# Altium PCB hexboard_round.PcbDoc
Units mil, origin at the board's own origin, x right, y up, seen from the top; angles counter-clockwise.
Board outline 2598.43 x 2250.64 mil, 2 copper layers (Top Layer, Bottom Layer); 67 components, 57 nets, 280 pads, 25 vias.
Unrouted connection lines stored in the file: 73.
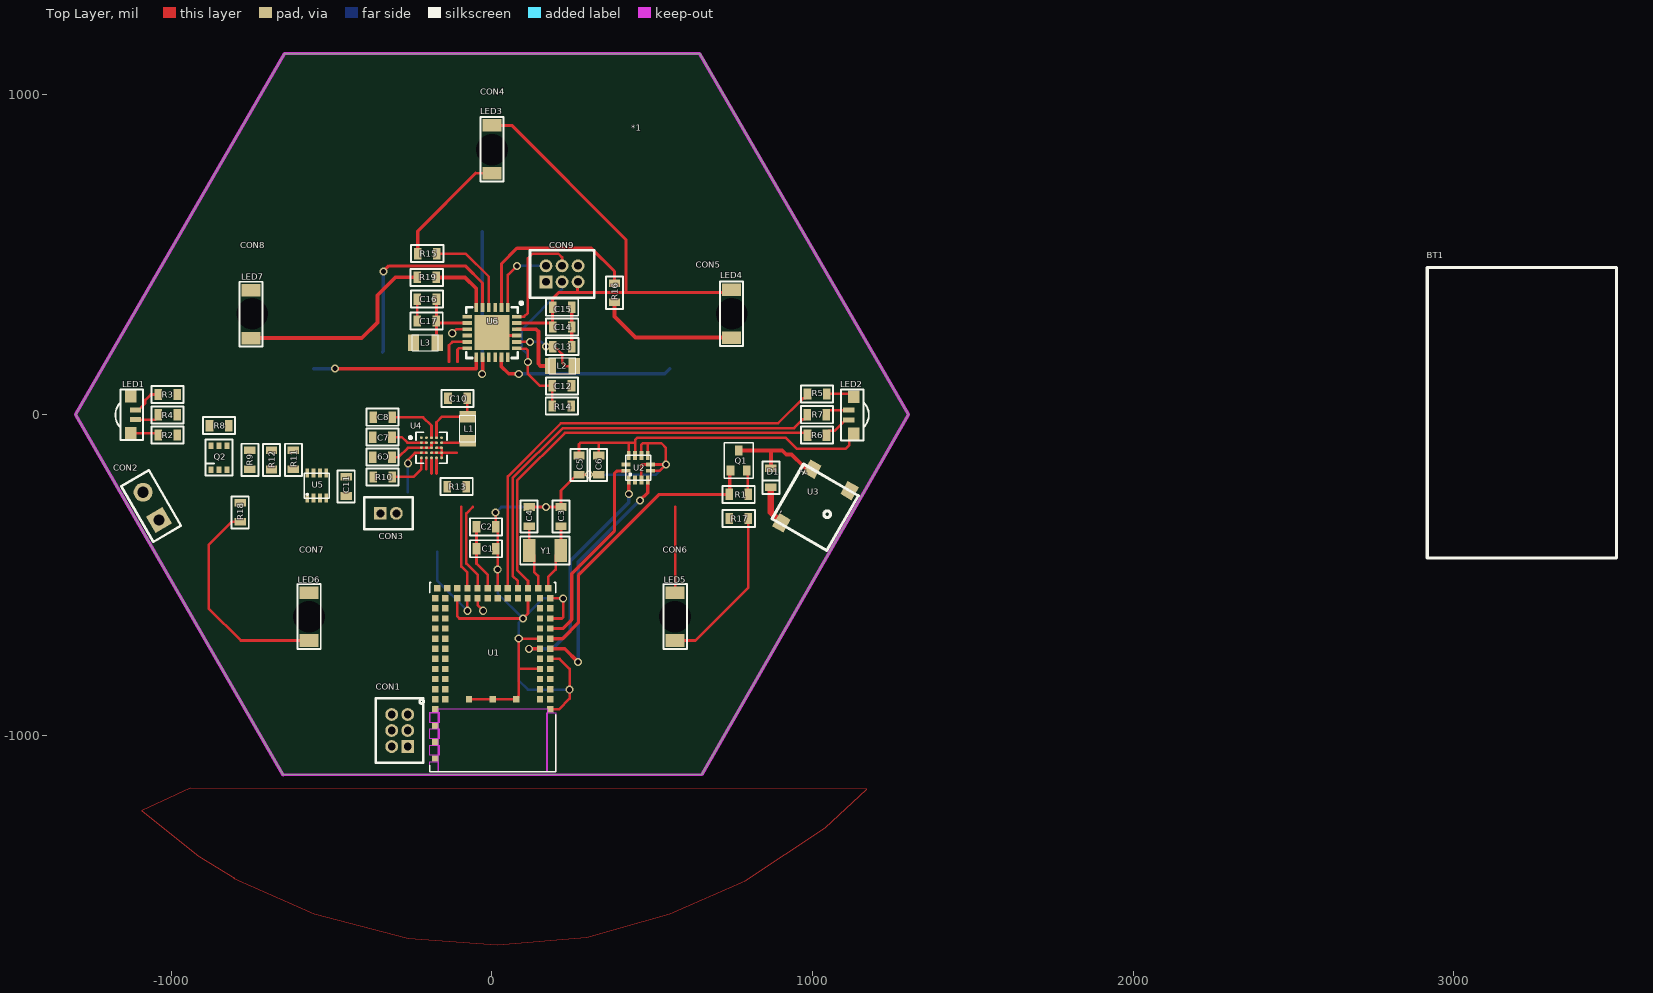
[diagram p0: Top Layer view]
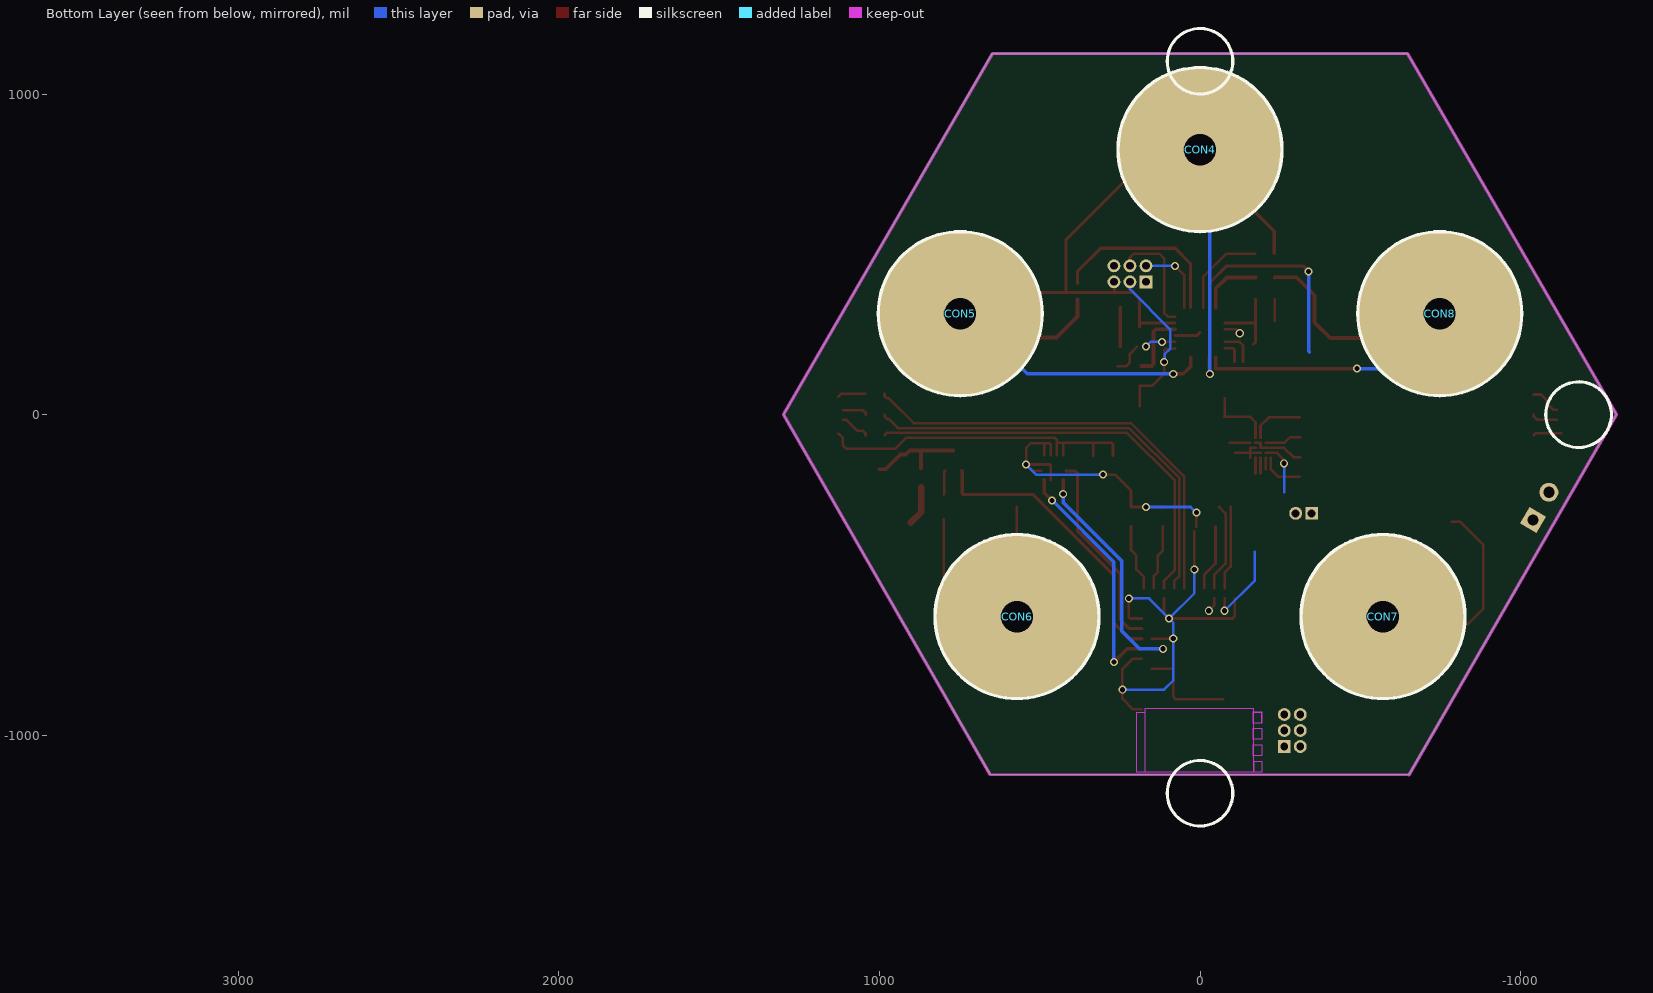
[diagram p1: Bottom Layer view, seen from below]
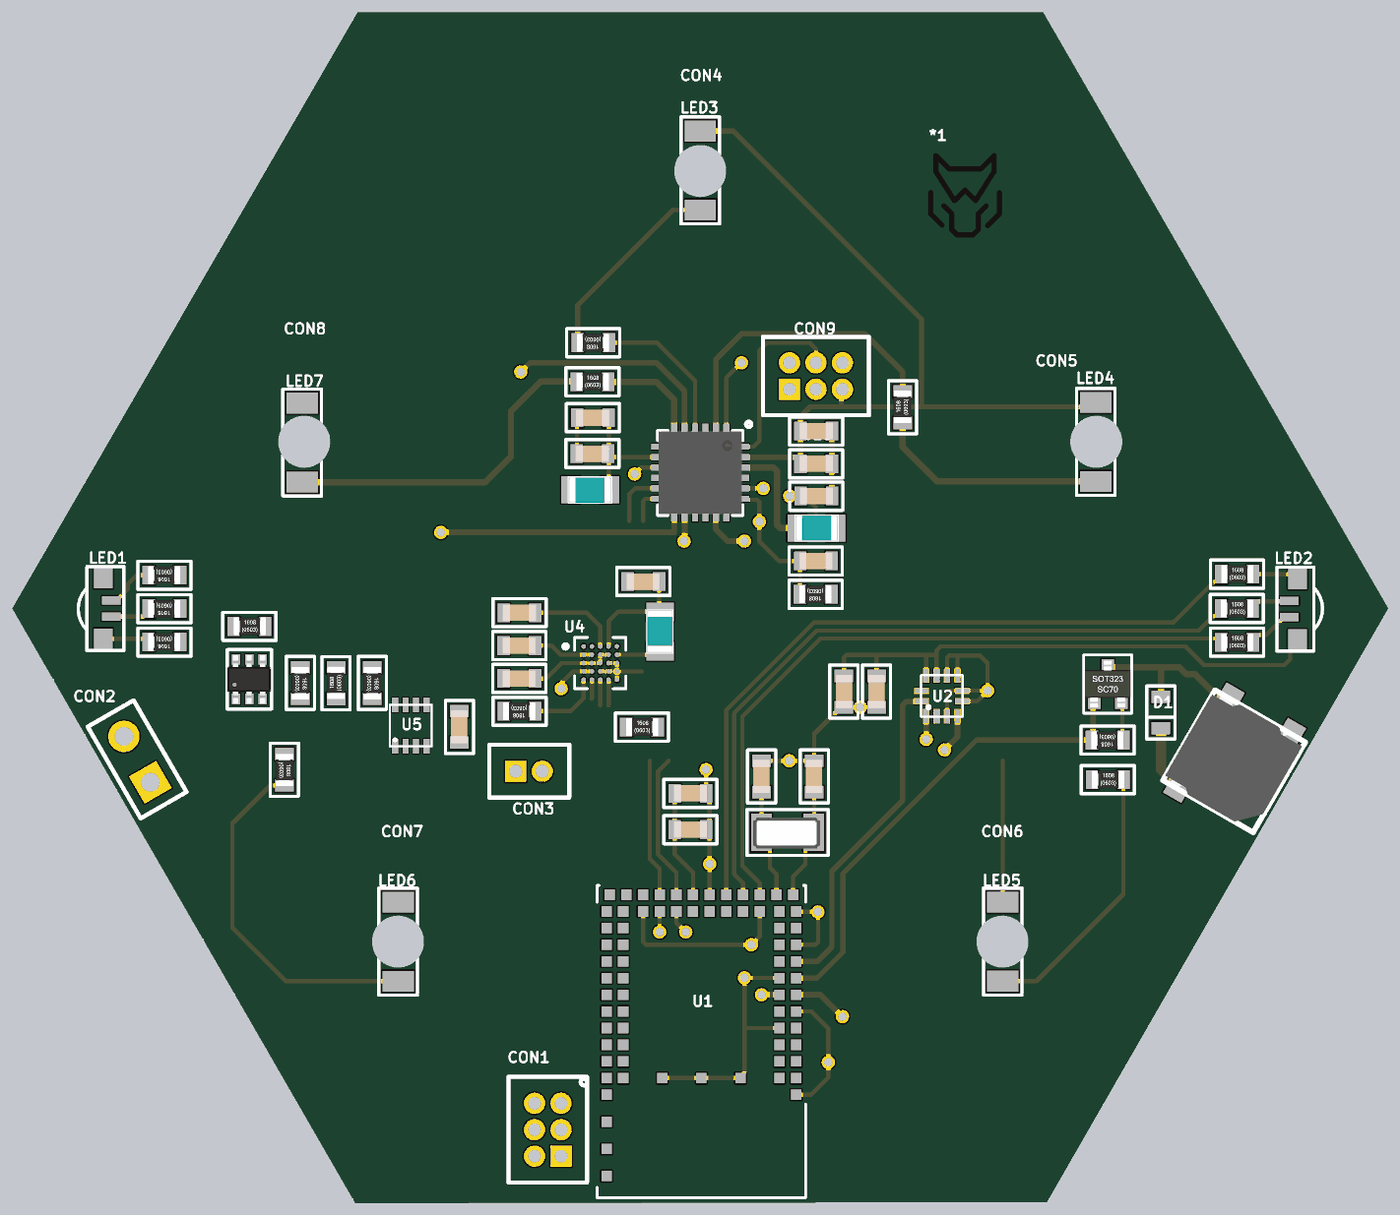
[diagram p2: 3D render of the assembled board from above, using the file's embedded part models]

## Layer stack, top to bottom
Top Solder: solder mask 0.4, Solder Resist, Dk 3.5
Top Layer: signal copper 1.4
Dielectric1: dielectric 12.6, FR-4, Dk 4.8
Bottom Layer: signal copper 1.4
Bottom Solder: solder mask 0.4, Solder Resist, Dk 3.5

## Board outline
-651.46,-1124.08 -1299.21,0 -647.17,1126.55 647.62,1126.3 1299.21,0 654.64,-1122.23

## Design rules (kind name [scope] priority, off if disabled: settings)
Clearance [All] p1: gap=7 ignorepadtopadclearanceinfootprint=FALSE except(0: Arc-Hole Track-Hole SMDPad-Hole THPad-Hole Via-Hole Fill-Hole Poly-Hole Region-Hole Text-Hole; 4: Arc-SMDPad Arc-THPad Arc-Via Track-SMDPad Track-THPad Track-Via SMDPad-SMDPad SMDPad-THPad SMDPad-Via THPad-THPad THPad-Via; 8: THPad-Text)
ComponentClearance [All] p1 off: gap=10 collisioncheckmode=3 verticalgap=10 showdistances=FALSE
HoleSize [All] p1: absolutevalues=TRUE maxlimit=150 minlimit=1 maxpercent=80.000 minpercent=20.000
PlaneConnect [All] p1: planeconnectstyle=Direct reliefexpansion=20 reliefentries=4 reliefconductorwidth=10 reliefairgap=10
PolygonConnect PolygonConnect_vias [All] p1: thpad.connectstyle=Direct thpad.reliefconductorwidth=10 thpad.reliefentries=4 thpad.polygonreliefangle="90 Angle" thpad.airgapwidth=10 smdpad.connectstyle=Relief smdpad.reliefconductorwidth=10 smdpad.reliefentries=4 smdpad.polygonreliefangle="90 Angle" smdpad.airgapwidth=10 via.connectstyle=Direct via.reliefconductorwidth=10 via.reliefentries=4 via.polygonreliefangle="90 Angle" via.airgapwidth=10
RoomDefinition Accessories [InComponentClass('Accessories')] p1: confinementstyle=ConfineIn formatcopy=TRUE lockcomponents=FALSE outline -3800,-4800 -1800,-4800 -1800,-3800 -3800,-3800
RoomDefinition Touch_panel [InComponentClass('Touch_panel')] p2: confinementstyle=ConfineIn formatcopy=TRUE lockcomponents=FALSE outline -3800,-4800 -1800,-4800 -1800,-3800 -3800,-3800
RoomDefinition Power_supply [InComponentClass('Power_supply')] p3: confinementstyle=ConfineIn formatcopy=TRUE lockcomponents=FALSE outline -3800,-4800 -1800,-4800 -1800,-3800 -3800,-3800
RoomDefinition CPU [InComponentClass('CPU')] p4: confinementstyle=ConfineIn formatcopy=TRUE lockcomponents=FALSE outline -3800,-4800 -1800,-4800 -1800,-3800 -3800,-3800
RoutingVias [All] p1: holewidth=16 width=25 viastyle="Through Hole" minholewidth=10 minwidth=18 maxholewidth=16 maxwidth=50
SilkToSolderMaskClearance SilkscreenOverComponentPads [IsPad] p1: minsilkscreentomaskgap=10 clearancetoexposedcopper=TRUE
SolderMaskExpansion [All] p1: expansion=3 istentingtop=FALSE
Width [All] p1: maxlimit=100 minlimit=8 preferedwidth=8 minimp=50.000000 maximp=50.000000 favimp=50.000000
26 further rules are at their usual default settings.

## Classes and differential pairs
component class Accessories: C5 C6 D1 LED1 LED2 Q1 R1 R2 R3 R4 R5 R6 R7 U2 U3
component class Power_supply: BT1 C7 C8 C9 C10 C11 CON2 CON3 L1 Q2 R8 R9 R10 R11 R12 R13 U4 U5
component class CPU: *1 C1 C2 C3 C4 CON1 U1 Y1
component class Touch_panel: C12 C13 C14 C15 C16 C17 CON4 CON5 CON6 CON7 CON8 CON9 L2 L3 LED3 LED4 LED5 LED6 LED7 R14 R15 R16 R17 R18 R19 U6

## Components (designator, comment, footprint, x,y, rotation, side; value= is the part's Value field where it differs from the comment)
*1 "LOGO" NEWLOGO2 500,791.34 r0 top
BT1 "BATTERY_LI_ION" "LI-ion battery 100mAh" 3507.87,-446.85 r90 top
C1 "100nF" C0603L -18.46,-416.89 r0 top
C2 "1uF" C0603L -18.46,-348.44 r0 top
C3 "10pF" C0603L 214.01,-317.57 r90 top
C4 "10pF" C0603L 114.53,-317.57 r90 top
C5 "100nF" C0603L 272.59,-157.38 r270 top
C6 "1uF" C0603L 334.17,-157.38 r270 top
C7 "2,2uF" C0603L -341.91,-71.5 r180 top
C8 "10uF" C0603L -341.55,-9.35 r180 top
C9 "10uF" C0603L -341.91,-133.73 r180 top
C10 "10uF" C0603L -107.68,49.49 r180 top
C11 "100nF" C0603L -456.17,-223.81 r90 top
C12 "100nF" C0603L 218.47,90.87 r0 top
C13 "100nF" C0603L 219.4,213.53 r0 top
C14 "100nF" C0603L 219.09,274.56 r0 top
C15 "10uF" C0603L 219.09,336.41 r0 top
C16 "100nF" C0603L -203.13,359.21 r180 top
C17 "1uF" C0603L -203.94,291.19 r180 top
CON1 "SWD" HDR2x3_1mm27 -287.99,-985.43 r90 top
CON2 "Header 2" HDR1X2 -1038.59,-328.6 r120 top
CON3 "Battery" HDR1X2_1mm27 -348.47,-307.81 r0 top
CON4 "Header1" P_CAP_13mm_B 0,826.77 r0 top
CON5 "Header1" P_CAP_13mm_B 748.03,314.96 r0 top
CON6 "Header1" P_CAP_13mm_B 570.87,-629.92 r0 top
CON7 "Header1" P_CAP_13mm_B -570.87,-629.92 r0 top
CON8 "Header1" P_CAP_13mm_B -748.03,314.96 r0 top
CON9 "SWD" HDR2x3_1mm27 218.54,439.18 r0 top
D1 "4148" 0603-DIODE 870.08,-167.31 r270 top
L1 "2.2uH" L0805 -75.78,-43.95 r90 top
L2 "BLM18PG471SN1" L0805 219.4,151.64 r0 top
L3 "BLM18PG471SN1" L0805 -207.91,224.21 r180 top
LED1 "LED_RGB" LED_604APFA3010LSEEZGKQ -1119.84,0.01 r270 top
LED2 "LED_RGB" LED_604APFA3010LSEEZGKQ 1120.32,-1.55 r90 top
LED3 "LED" LED1206_BOTTOM_2_5 -39.21,931.42 r270 top
LED4 "LED" LED1206_BOTTOM_2_5 707.86,418.3 r270 top
LED5 "LED" LED1206_BOTTOM_2_5 532.12,-526.22 r270 top
LED6 "LED" LED1206_BOTTOM_2_5 -609.9,-526.3 r270 top
LED7 "LED" LED1206_BOTTOM_2_5 -791.05,417.04 r270 top
Q1 "BSS138W" SOT-323 744.09,-174.46 r0 top
Q2 "Si1555DL" SOT-363 -876.67,-171.43 r0 top
R1 "330k" 1608[0603] 769.69,-249.26 r180 top
R2 "1k" 1608[0603] -1011.81,-63.95 r180 top
R3 "1k" 1608[0603] -1011.81,62.48 r180 top
R4 "1k" 1608[0603] -1011.81,-0.96 r180 top
R5 "1k" 1608[0603] 1013.78,64.96 r0 top
R6 "1k" 1608[0603] 1013.65,-63.68 r0 top
R7 "1k" 1608[0603] 1013.33,0 r0 top
R8 "330k" 1608[0603] -851.67,-33.72 r0 top
R9 "33k" 1608[0603] -755.03,-140.73 r270 top
R10 "10k" 1608[0603] -341.16,-194.68 r180 top
R11 "330k" 1608[0603] -619.08,-140.71 r270 top
R12 "47k" 1608[0603] -688.24,-141.59 r90 top
R13 "10k" 1608[0603] -110.32,-224.13 r0 top
R14 "100k" 1608[0603] 218.15,26.4 r180 top
R15 "1k" 1608[0603] -201.82,501.97 r180 top
R16 "1k" 1608[0603] 381.89,380.07 r90 top
R17 "1k" 1608[0603] 769.69,-323.44 r0 top
R18 "1k" 1608[0603] -785.17,-304.72 r270 top
R19 "1k" 1608[0603] -203.79,428.56 r0 top
U1 "BL653" BL653 2.14,-818.9 r180 top
U2 "LIS2DH12" LGA50P200X200X100-12N 456.27,-165.45 r90 top
U3 "BUZZER" SMT28 972.28,-154.47 r240 top
U4 "nPM1100" BGA25C40P5X5_207X207X52N -188.81,-103.32 r0 top
U5 "MAX17048G" TDFN8_2x2x075 -546.72,-221.45 r0 top
U6 "ATSAML10_24" QFN24_4x4 0,256.48 r270 top
Y1 "32768Hz" X_FC-13F 164.77,-423.56 r180 top

## Footprints (in the part's own frame and the unit in brackets; to place one, negate y for a bottom-side part, rotate by r counter-clockwise, add the part's x,y. Pads: shape width x height; smd on the part's side, far side on the other; paste and mask are expansions set on the pad)
0603-DIODE [mm]
  rect 0.6x0.9 smd: 1(0,0) 2(1.5,0)
  silkscreen extent -0.52,-0.68 2.03,0.67, body extent -0.05,-0.4 1.55,0.4, height 0.66
1608[0603] [mm] "Body 1.6 x 0.8 mm (LxW typ)"
  rect 0.6x0.9 smd: 1(-0.75,-0.01) 2(0.76,-0.01)
  silkscreen extent -1.27,-0.68 1.28,0.67, body extent -0.75,-0.43 0.79,0.42, height 0.45
BGA25C40P5X5_207X207X52N [mm]
  round 0.22 smd: A1(-0.8,0.8) A2(-0.4,0.8) A3(0,0.8) A4(0.4,0.8) A5(0.8,0.8) B1(-0.8,0.4) B2(-0.4,0.4) B3(0,0.4) B4(0.4,0.4) B5(0.8,0.4) C1(-0.8,0) C2(-0.4,0) C3(0,0) C4(0.4,0) C5(0.8,0) D1(-0.8,-0.4) D2(-0.4,-0.4) D3(0,-0.4) D4(0.4,-0.4) D5(0.8,-0.4) E1(-0.8,-0.8) E2(-0.4,-0.8) E3(0,-0.8) E4(0.4,-0.8) E5(0.8,-0.8)
  silkscreen extent -1.76,-1.23 1.23,1.23, body extent -1.04,-1.04 1.04,1.04, height 0.5
BL653 [mm]
  rect 0.5x0.5 smd: 0(4.55,2.55) 1(4.55,1.75) 2(3.75,1.75) 3(4.55,0.95) 4(3.75,0.95) 5(4.55,0.15) 6(3.75,0.15) 7(4.55,-0.65) 8(3.75,-0.65) 9(4.55,-1.45) 10(3.75,-1.45) 11(4.55,-2.25) 12(3.75,-2.25) 13(4.55,-3.05) 14(3.75,-3.05) 15(4.55,-3.85) 16(3.75,-3.85) 17(4.55,-4.65) 18(3.75,-4.65) 19(4.55,-5.45) 20(3.75,-5.45) 21(4.55,-6.25) 22(3.75,-6.25) 23(4.4,-7.05) 24(3.6,-7.05) 25(2.8,-7.05) 26(2.8,-6.25) 27(2,-7.05) 28(2,-6.25) 29(1.2,-7.05) 30(1.2,-6.25) 31(0.4,-7.05) 32(0.4,-6.25) 33(-0.4,-7.05) 34(-0.4,-6.25) 35(-1.2,-7.05) 36(-1.2,-6.25) 37(-2,-7.05) 38(-2,-6.25) 39(-2.8,-7.05) 40(-2.8,-6.25) 41(-3.6,-7.05) 42(-4.4,-7.05) 43(-4.55,-6.25) 44(-3.75,-6.25) 45(-4.55,-5.45) 46(-3.75,-5.45) 47(-4.55,-4.65) 48(-3.75,-4.65) 49(-4.55,-3.85) 50(-3.75,-3.85) 51(-4.55,-3.05) 52(-3.75,-3.05) 53(-4.55,-2.25) 54(-3.75,-2.25) 55(-4.55,-1.45) 56(-3.75,-1.45) 57(-4.55,-0.65) 58(-3.75,-0.65) 59(-4.55,0.15) 60(-3.75,0.15) 61(-4.55,0.95) 62(-3.75,0.95) 63(-4.55,1.75) 64(-3.75,1.75) 65(-4.55,2.55) 66(4.55,3.85) 67(4.55,5.15) 68(4.55,6.45) 69(1.875,1.75) 70(0,1.75) 71(-1.875,1.75)
  Keep-Out Layer region: -4.3,2.804 -5.008,2.804 -5.008,7.5 -4.3,7.5
  Keep-Out Layer region: -4.3,2.804 -5.007,2.804 -5.007,7.5 -4.3,7.5
  Keep-Out Layer region: 5,5.408 4.256,5.408 4.256,6.2 5,6.2
  Keep-Out Layer region: 4.95,2.804 4.256,2.804 4.256,3.6 4.95,3.6
  Keep-Out Layer region: 5,4.104 4.255,4.104 4.255,4.9 5,4.9
  Keep-Out Layer region: 5,5.403 4.252,5.403 4.252,6.2 5,6.2
  Keep-Out Layer region: 5,6.712 4.308,6.712 4.308,7.5 5,7.5
  Keep-Out Layer region: 5,2.8 4.251,2.8 4.251,3.6 5,3.6
  Keep-Out Layer region: 5,4.102 4.252,4.102 4.252,4.9 5,4.9
  Keep-Out Layer region: 5,6.707 4.305,6.707 4.305,7.5 5,7.5
  Keep-Out Layer region: 4.3,2.503 -4.305,2.503 -4.305,7.5 4.3,7.5
  Keep-Out Layer region: 4.3,2.503 -4.306,2.503 -4.306,7.5 4.3,7.5
  silkscreen extent -5,-7.5 5.79,7.5
C0603L [mm]
  rect 0.6x0.9 smd: 1(-0.76,-0.03) 2(0.75,-0.03)
  silkscreen extent -1.28,-0.71 1.27,0.64, body extent -0.8,-0.43 0.8,0.37, height 0.8
HDR1X2 [mm] "Connector; Header; 2 Position"
  rect 1.5x1.5 hole 0.9: 1(0,0)
  round 1.5 hole 0.9: 2(2.54,0)
  silkscreen extent -1.27,-1.27 3.81,1.27
HDR1X2_1mm27 [mil]
  rect 40x40 hole 25: 1(0,0)
  round 40 hole 25: 2(50.02,-0.01)
  silkscreen extent -50,-50 101,50
HDR2x3_1mm27 [mil]
  rect 40x40 hole 24: 1(-50,-25)
  round 40 hole 24: 2(-50,25) 3(0,-25) 4(0,25) 5(50,-25) 6(50,25)
  silkscreen extent -100,-74 100,74
L0805 [mm] "Chip Inductor; Body 2.0 x 1.3 mm (LxW typ)"
  rect 0.9x1.3 smd: 1(-0.94,0) 2(0.94,0)
  silkscreen extent -1.03,-0.62 1.05,0.64, body extent -0.99,-0.59 1.01,0.61, height 1.3
LED1206_BOTTOM_2_5 [mm]
  rect 1x1.5 smd: 1(0.74,1) 2(4.53,1)
  silkscreen extent 0.06,0.07 5.2,1.92
LED_604APFA3010LSEEZGKQ [mm]
  rect 1x0.9 smd: 1(1.461,-0.194) 2(-1.461,-0.194)
  rect 0.4x0.9 smd: 3(-0.382,0.194) 4(0.4,0.194)
  silkscreen extent -2.01,-1.4 2.02,0.79
LGA50P200X200X100-12N [mm] "LGA, 12-Leads, Body 2.00x2.00mm, Pitch 0.50mm, IPC Medium Density"
  rect 0.7x0.3 smd paste-0.025 mask+0.05: 1(-0.975,0.75) 2(-0.975,0.25) 3(-0.975,-0.25) 4(-0.975,-0.75) 7(0.975,-0.75) 8(0.975,-0.25) 9(0.975,0.25) 10(0.975,0.75)
  rect 0.3x0.7 smd paste-0.025 mask+0.05: 5(-0.25,-0.975) 6(0.25,-0.975) 11(0.25,0.975) 12(-0.25,0.975)
  silkscreen extent -0.99,-1 1,1, body extent -1,-1 1,1, height 1.01
"LI-ion battery 100mAh" [mil]
  silkscreen extent 0,0 906,591, body extent 0,0 907,591, height 138
NEWLOGO2 [mil]
P_CAP_13mm_B [mm]
  round 13 smd far side: 1(0,0)
  round 0 hole 2.5 unplated: 2(0,0)
QFN24_4x4 [mm]
  rect 0.75x0.3 smd mask+0.05: 1(-1.975,1.25) 2(-1.975,0.75) 3(-1.975,0.25) 4(-1.975,-0.25) 5(-1.975,-0.75) 6(-1.975,-1.25) 13(1.975,-1.25) 14(1.975,-0.75) 15(1.975,-0.25) 16(1.975,0.25) 17(1.975,0.75) 18(1.975,1.25)
  rect 0.3x0.75 smd mask+0.05: 7(-1.25,-1.975) 8(-0.75,-1.975) 9(-0.25,-1.975) 10(0.25,-1.975) 11(0.75,-1.975) 12(1.25,-1.975) 19(1.25,1.975) 20(0.75,1.975) 21(0.25,1.975) 22(-0.25,1.975) 23(-0.75,1.975) 24(-1.25,1.975)
  rect 2.75x2.75 smd paste-100 mask+0.05: 25(0,0)
  silkscreen extent -2.45,-2.03 2.03,2.45, body extent -2,-2 2,2, height 1
SMT28 [mm]
  rect 1.2x1.016 smd: 0(0,4.2) 1(0,0.8) 2(4.9,0.8)
  silkscreen extent 0,0 5,5, body extent 0,-0.03 5.02,4.97, height 2
SOT-323 [mm]
  rect 0.6x0.8 smd: 1(0,0) 2(1.3,0) 3(0.65,1.6)
  silkscreen extent -0.5,-0.6 1.8,2.2, body extent -0.45,-0.32 1.75,1.92, height 1.1
SOT-363 [mil]
  rect 16x20 smd mask+1.97: 1(0,0) 2(25,0) 3(50,0) 4(50,75) 5(25,75) 6(0,75)
  silkscreen extent -17,-19 67,94, body extent -17,-8 66,83, height 39
TDFN8_2x2x075 [mm]
  rect 0.3x0.7 smd mask+0.05: 1(-0.75,-0.99) 2(-0.25,-0.99) 3(0.25,-0.99) 4(0.75,-0.99) 5(0.75,0.99) 6(0.25,0.99) 7(-0.25,0.99) 8(-0.75,0.99)
  silkscreen extent -1,-1 1,1, body extent -1,-1.01 1,1.02, height 0.76
X_FC-13F [mm] "Crystal 3.2x1.5x0.55"
  rect 1x1.8 smd: 1(-1.255,0) 2(1.245,0)
  silkscreen extent -1.96,-1.1 1.94,1.1, body extent -1.56,-0.72 1.64,0.78, height 0.9

## Part data
BT1: "Battery"
C1 C2 C3 C4 C5 C6 C7 C8 C9 C10 C11 C12 C13 C14 C15 C16 C17: library part CAP, "Capacitor"
CON1 CON9: library part "Header 3X2", "Header, 3-Pin, Dual row", LatestRevisionDate=17-Jul-2002, LatestRevisionNote="Re-released for DXP Platform.", Publisher="Altium Limited"
CON2: "Header, 2-Pin", LatestRevisionDate=17-Jul-2002, LatestRevisionNote="Re-released for DXP Platform.", Publisher="Altium Limited"
CON3: library part "Header 2", "Header, 2-Pin", LatestRevisionDate=17-Jul-2002, LatestRevisionNote="Re-released for DXP Platform.", Publisher="Altium Limited"
D1: library part D, "DIODE"
L1 L2 L3: library part INDUCTOR
LED1 LED2: library part LED_RGB_2, "Red/green/blue LED"
Q1: "N-MOSFET", Manufacturer 1=-, Manufacturer 1 PartNo=-, Supplier 1=-, Supplier 1 PartNo=-
R1 R2 R3 R4 R5 R6 R7 R8 R9 R10 R11 R12 R13 R14 R15 R16 R17 R18 R19: library part RES
U1: "802.15.4, Bluetooth Bluetooth v5.0, Thread Transceiver Module 2.4GHz Integrated, Trace Surface Mount", Package="Module Laird -", Digi-Key_Part_Number=451-00001CT-ND, Digi-Key_Purchase_URL=https://www.digikey.com/product-detail/en/laird-wireless-thermal-systems/451-00001/451-00001CT-ND/9489361?utm_source=snapeda&utm_medium=aggregator&utm_campaign=symbol, MF="Laird -", MP=451-00001, SnapEDA_Link=https://www.snapeda.com/parts/451-00001/Laird%20-%20Wireless%20%26%20Thermal%20Systems/view-part/2777643/?ref=snap
U2: "3-axis - ±2g/±4g/±8g/±16g digital output femto accelerometer", 2nd source part number=243-3081, Manufacturer=STMicroelectronics, Part number IPS=00000007817, Supplier part number=497-14851-1-ND, 2nd source Supplier=Farnell, Artikkelnr Noca=N.A., Artikkelnr Simpro=N.A., Datasheet=http://www.st.com/st-web-ui/static/active/en/resource/technical/document/datasheet/DM00091513.pdf, Footprint Doc=LGA-12, LatestRevisionDate=2015-09-29, Manufacturer Part Number=LIS2DH12, Note="MEMS digital output motion sensor ultra low-power high performance 3-axes \"femto\" accelerometer", Part Number=LIS2DH12, Pin Count=12, Published=2015-09-29, Publisher="Nordic Semiconductor", Supplier=Digi-Key
U4: "Integrated Power Managment IC"
U5: "1-Cell/2-Cell Fuel Gauge with ModelGauge"
U6: library part ATSAML10D15, "Cortex M0+ microcontroller"
Y1: library part CRYSTAL, "Crystal"
Q2: ComponentLink1Description=Datasheet, ComponentLink1URL=https://www.diodes.com/assets/Datasheets/ds30380.pdf, Montage=SMD

## Via types
v1: diameter 25, hole 16, Top Layer to Bottom Layer, 25 vias

## Nets (pads, with @x,y where several pads share a name; then routed paths per layer and width w, separated by ;. In a path a pad name is that pad's centre, name@x,y a point inside that pad or via, vN(x,y) a via of type N, cw(c..) or ccw(c..) an arc to the next point about the centre after c; other vN are vias at no path point)
ACCEL_INT_1: U1.49 U2.12 | length 629.4
  Top Layer w10: U1.49 220.73,-667.32 248.62,-639.44 248.62,-496.58 381.89,-363.31 381.89,-183.54 389.24,-176.19 416.98,-176.19 U2.12
BAT_CHRG: U1.30 U4.E4 | length 95
  Top Layer w8: -173.06,-183.54 U4.E4 ; U1.30 -45.11,-594.09 -27.47,-611.73 v1(-27.34,-611.73)
BAT_ERR: U1.28 U4.E3 | length 310.6
  Top Layer w8: -188.81,-183.54 U4.E3 ; v1(-76.6,-611.73) U1.28
  Bottom Layer w8: -171.09,-427.91 -171.09,-517.24 v1(-76.6,-611.73)
BUZ: Q1.1 R1.2 U1.51 | length 907.9
  Top Layer w10: U1.51 220.28,-698.82 269.4,-649.7 269.4,-501.4 521.93,-248.87 R1.2 741.93,-246.7 741.93,-176.63 Q1.1
EN_USB_DET: Q2.2 R11.2 U1.20
GND: C1.2 C2.2 C3.2 C4.2 C5.2 C6.2 C7.2 C8.2 C9.2 C10.2 C11.2 C12.2 C13.2 C14.2 C15.2 C16.2 C17.2 CON1.1 CON2.1 CON3.2 CON9.1 Q1.2 Q2.1 R1.1 R10.2 R11.1 R12.1 R13.2 U1.0 U1.23 U1.26 U1.33 U1.40 U1.43 U1.47 U1.52 U1.55 U1.58 U1.65 U1.66 U1.67 U1.68 U1.69 U1.70 U1.71 U2.3 U2.5 U2.6 U2.7 U2.8 U4.A1 U4.A5 U4.C4 U4.C5 U4.D3 U4.D4 U4.D5 U4.E5 U5.1 U5.4 U5.6 U6.9 U6.21 | length 3736.5
  Top Layer w8: C17.2 -233.06,292.77 -233.06,359.98 C16.2 ; U4.D3 U4.D4 U4.D5 ; U4.C4 U4.C5 U4.D5 ; U4.E5 U4.D5 ; v1(-124.02,253.94) -111.63,266.32 U6.9 ; -110.32,-119.07 U4.D5 ; U1.26 -108.1,-629.45 -101.72,-635.83 v1(96.46,-635.83) 112.37,-619.91 U1.40 ; U1.69 U1.70 U1.71 81.8,-881.95 81.8,-878.92 83.45,-877.27 83.45,-793.31 ; C2.2 v1(11.06,-304.72) ; U1.33 v1(17.89,-483.02) C2.2@17.89,-363.51 ; C4.2 v1(168.03,-288.05) C3.2 215.19,-237.23 265.5,-186.91 C5.2 v1(302.2,-186.91) C6.2 ; U1.58 83.45,-793.31 ; U1.52 149.47,-698.51 83.76,-698.51 v1(83.45,-698.21) 83.45,-793.31 ; U1.65 208.83,-919.29 242,-886.12 v1(242,-858) 242,-793.31 210.5,-761.81 U1.55 ; U1.47 218.11,-635.83 222.8,-631.14 222.8,-574.3 221.75,-573.26 181.69,-573.26 U1.43 ; U2.3 466.11,-157.38 467.89,-155.6 U2.6 v1(542.7,-155.6) ; U2.8 466.11,-93.36 470.8,-88.67 528.05,-88.67 542.7,-103.32 v1(542.7,-155.6) ; U2.7 485.8,-93.36 ; U2.5 523.02,-175.29 v1(542.7,-155.6) ; Q1.2 797.24,-176.43 797.24,-246.9 R1.1
  Top Layer w10: 0,256.48 9.84,246.64 U6.21 ; C15.2 248.77,335.08 248.77,212.51 C13.2
  Bottom Layer w8: v1(11.06,-304.72) 12.37,-304.72 29.04,-288.05 v1(168.03,-288.05) ; v1(17.89,-483.02) 17.89,-557.26 v1(96.46,-635.83) ; v1(222.17,-573.68) 221.57,-573.08 159.2,-573.08 v1(96.46,-635.83) ; v1(242,-858) 111.84,-858 83.45,-829.62 v1(83.45,-698.21) 83.45,-649.01 96.46,-636.01 v1(96.46,-635.83) ; v1(302.2,-186.91) 511.4,-186.91 v1(542.7,-155.6)
LED_1: R15.1 U6.4 | length 288.3
  Top Layer w8: R15.1 -81.97,502.36 -9.84,430.23 U6.4
LED_2: R16.2 U6.2 | length 576.3
  Top Layer w10: U6.2 29.53,470.98 77.76,519.21 309.93,519.21 382.28,446.85 R16.2
LED_3: R17.1 U6.3
LED_4: R18.1 U6.5 | length 668.8
  Top Layer w10: v1(-338.96,446.85) -321.63,464.18 -83.08,464.18 -29.53,410.63 U6.5
  Bottom Layer w10: -341.91,194.47 -338.96,197.42 v1(-338.96,446.85)
LED_5: R19.2 U6.6 | length 198.4
  Top Layer w12: R19.2 -83.68,428.16 -49.21,393.69 U6.6
LED_B: R4.1 R7.1 U1.37 | length 1354.7
  Top Layer w8: U1.37 80.88,-519.14 64.38,-502.64 64.38,-198.28 220.83,-41.83 942.36,-41.83 970.08,-14.11 975.99,-14.11 983.8,-6.3 R7.1
LED_G: R3.1 R6.1 U1.39 | length 1319.4
  Top Layer w8: U1.39 112.37,-518.6 79.38,-485.61 79.38,-204.49 227.05,-56.83 976.88,-56.83 R6.1
LED_R: R2.1 R5.1 U1.35 | length 1394
  Top Layer w8: U1.35 49.38,-213.23 49.21,-213.06 49.21,-192.24 214.64,-26.81 892.87,-26.81 970.54,50.85 976.44,50.85 984.25,58.66 R5.1
NetC8_1: C8.1 U4.A3 | length 171.2
  Top Layer w8: C8.1 -214.81,-8.17 -188.81,-34.17 U4.A3
NetC10_1: C10.1 L1.2 U4.A4 | length 210.5
  Top Layer w8: U4.A4 -173.06,-23.66 -155.88,-6.47 L1.2@-76.26,-6.47 ; C10.1 -77.76,-4.98 L1.2@-76.26,-6.47 ; L1.2 L1.2@-76.26,-6.47
NetC13_1: C13.1 L2.2 U6.20 | length 197.2
  Top Layer w8: U6.20 v1(119,226.95) ; C13.1@197.35,211.51 219.04,189.82 219.04,162.6 229.99,151.64 L2.2
  Bottom Layer w8: v1(119,226.95) 154.17,226.95 v1(169.01,212.12)
NetC16_1: C16.1 C17.1 L3.1 U6.8 | length 240.1
  Top Layer w8: C17.1@-174.01,286.01 U6.8 ; C16.1 -173.2,226.5 L3.1 L3.1@-166.13,219.42
NetD1_1: D1.1 Q1.3 U3.1 | length 310.1
  Top Layer w12: Q1.3 870.08,-111.47 ; D1.1 870.08,-111.47 ; U3.1 980.78,-170.22 971.68,-161.12 971.23,-161.12 934.11,-123.99 917.96,-123.99 905.44,-111.47 870.08,-111.47
NetL1_1: L1.1 U4.B5 | length 64.9
  Top Layer w8: U4.B5 L1.1@-92.39,-87.58
NetL2_1: L2.1 U6.22 | length 211.1
  Top Layer w12: U6.22 137.73,266.32 144.76,259.3 144.76,158.67 151.79,151.64 L2.1
NetLED1_1: LED1.1 R2.2 | length 88.3
  Top Layer w8: LED1.1 -1047.79,-57.5 R2.2
NetLED1_3: LED1.3 R3.2 | length 96.1
  Top Layer w8: LED1.3 -1102.36,15.04 -1081.43,35.98 -1081.43,45.82 -1064.37,62.88 R3.2
NetLED1_4: LED1.4 R4.2 | length 80.2
  Top Layer w8: LED1.4 -1051.01,-15.75 -1041.73,-6.47 R4.2
NetLED2_1: LED2.1 R5.2 | length 87.8
  Top Layer w8: R5.2 1119.35,64.57 LED2.1
NetLED2_3: LED2.3 R6.2 | length 92.2
  Top Layer w8: R6.2 1043.57,-58.17 1051.38,-50.36 1069.06,-50.36 1102.84,-16.58 LED2.3
NetLED2_4: LED2.4 R7.2 | length 78.9
  Top Layer w8: R7.2 1043.25,5.51 1051.06,13.32 1111.79,13.32 LED2.4
NetLED3_2: LED3.2 R15.2 | length 377
  Top Layer w8: -51.37,753.08 LED3.2
  Top Layer w10: R15.2 -231.74,572.71 -51.37,753.08
NetLED4_2: LED4.2 R16.1 | length 446
  Top Layer w12: R16.1@382.28,359.64 382.28,305.69 447.82,240.16 LED4.2@747.23,240.16
NetLED5_2: LED5.2 R17.2 | length 509.7
  Top Layer w8: LED5.2 634.85,-704.57 799.21,-540.21 R17.2@799.21,-326.3
NetLED6_2: LED6.2 R18.2 | length 680.5
  Top Layer w8: R18.2 -811.98,-334.64 -883.68,-406.33 -883.68,-604.33 -783.36,-704.65 LED6.2
NetLED7_2: LED7.2 R19.1 | length 637.4
  Top Layer w12: LED7.2@-742.01,238.69 -406.32,238.69 -357.45,287.56 -357.45,372.68 -301.57,428.56 -233.71,428.56 R19.1
NetQ2_3: Q2.3 R9.2
NetQ2_5: Q2.5 Q2.6 R8.1
NetR10_1: R10.1 U4.E1 | length 136.4
  Top Layer w8: R10.1 -244.91,-194.28 -220.3,-169.68 U4.E1
NetR13_1: R13.1 U4.E2 | length 36.3
  Top Layer w8: -205.3,-170.81 -205.3,-170.31 -204.56,-169.56 U4.E2
SCL: U1.54 U2.1 U5.7 | length 732.1
  Top Layer w11: v1(115.77,-730.32) U1.54 ; v1(426.74,-247.51) U2.1
  Bottom Layer w11: v1(115.77,-730.32) 188.78,-730.32 244.84,-674.26 244.84,-456.06 426.74,-274.15 v1(426.74,-247.51)
SCL_TOUCH: U1.27 U6.11 | length 372.9
  Top Layer w8: -134.15,165.39 -134.15,216.49 -123.68,226.95 U6.11 ; -95.32,-288.05 -95.32,-473.66 -76.6,-492.38 U1.27
SDA: U1.53 U2.4 U5.8 | length 762.2
  Top Layer w11: U1.53 227.13,-730.32 v1(268.47,-771.65) ; v1(461.33,-267.57) 485.8,-243.11 U2.4
  Bottom Layer w11: v1(268.47,-771.65) 268.47,-460.44 v1(461.33,-267.57)
SDA_TOUCH: U1.29 U6.12 | length 344.9
  Top Layer w8: -107.68,165.39 -107.68,202.58 -102.99,207.27 U6.12 ; -60,-288.05 -79.72,-307.77 -79.72,-464.52 -45.11,-499.14 U1.29
SW_1: CON4.1 U6.14 | length 495.6
  Top Layer w11: v1(-30.6,127.23) -29.53,128.31 U6.14
  Bottom Layer w11: v1(-30.6,127.23) -30.6,570.87
SW_2: CON5.1 U6.17 | length 570.6
  Top Layer w11: U6.17 29.53,149.71 52.01,127.23 v1(83.45,127.23)
  Bottom Layer w11: v1(83.45,127.23) 538.6,127.23 555.04,143.67
SW_3: CON6.1 U6.16
SW_4: CON7.1 U6.15
SW_5: CON8.1 U6.13 | length 542.4
  Top Layer w11: v1(-490.16,143.67) -49.21,143.67 U6.13
  Bottom Layer w11: -556.56,143.67 v1(-490.16,143.67)
SWDCLK: CON1.4 U1.3
SWDIO: CON1.2 U1.1
SWDRST: CON1.3 U1.19
T_RESET: C12.1 CON9.3 R14.2 U6.19 | length 575.6
  Top Layer w8: U6.19 79.66,205.36 106.97,205.36 111.66,200.68 v1(111.66,163.95) 111.66,127.23 149.21,89.68 C12.1 188.39,89.53 188.39,26.95 R14.2
  Bottom Layer w8: v1(111.66,163.95) 110.23,165.39 110.23,188.45 93.32,205.36 93.32,266.32 219.04,392.05 219.04,413.69 CON9.3
T_SWDCLK: CON9.4 U6.24 | length 353.4
  Top Layer w8: U6.24 100.42,305.69 111.66,316.94 111.66,487.17 126.46,501.97 207.23,501.97 219.04,490.16 219.04,464.68 CON9.4
T_SWDIO: CON9.2 U6.1 | length 232.6
  Top Layer w8: U6.1 49.21,435.64 v1(77.76,464.18)
  Bottom Layer w8: v1(77.76,464.18) CON9.2
USB_DET: R9.1 R12.2 U1.22
VBAT: C11.1 CON3.1 D1.2 U3.2 U4.D1 U4.D2 U5.3 | length 292.6
  Top Layer w8: v1(-262.53,-151.74) -262.53,-141.11 -240.49,-119.07 U4.D1 U4.D2
  Top Layer w20: D1.2 870.08,-304.27 U3.2
  Bottom Layer w8: -262.53,-242 v1(-262.53,-151.74)
VSYS: C1.1 C2.1 C5.1 C6.1 C9.1 C14.1 C15.1 CON1.5 CON9.5 L3.2 LED1.2 LED2.2 LED3.1 LED4.1 LED5.1 LED6.1 LED7.1 R14.1 U1.31 U2.2 U2.9 U2.10 U4.B3 U4.B4 U4.C1 U4.C2 U4.C3 U6.23 | length 3232.9
  Top Layer w8: C9.1 -291.75,-132.55 -262.53,-103.32 U4.C1 U4.C2 U4.C3 U4.B3 U4.B4 ; C2.1 C1.1 -48.39,-464.52 -13.61,-499.3 U1.31 ; C5.1 271.41,-92.53 276.1,-87.85 332.99,-87.85 ; C6.1 332.99,-87.85 ; U2.10 426.74,-92.53 ; 441.74,-87.85 332.99,-87.85 ; U2.9 446.43,-79.11 453.71,-71.83 915.63,-71.83 950.79,-106.99 1102.84,-106.99 1114.24,-95.59 1114.24,-72.77 LED2.2 ; LED5.1 571.49,-288.05
  Top Layer w10: LED3.1 62.01,902.29 417.88,546.41 417.88,381 ; U6.23 182.37,286.01 C14.1@189.17,279.21 ; C14.1 C14.1@189.17,279.21 ; 266.37,386.86 266.37,412.01 CON9.5 ; LED4.1 739.06,381 417.88,381 ; C14.1@189.17,279.21 C15.1 189.17,362.17 207.99,381 417.88,381
VUSB: C7.1 CON2.2 Q2.4 R8.2 U4.B1 U4.B2 | length 114.6
  Top Layer w8: C7.1 -281.5,-70.32 -264.24,-87.58 U4.B1 U4.B2
XL1: C3.1 U1.42 Y1.1 | length 210.3
  Top Layer w8: U1.42 175.37,-506.16 198.51,-483.02 198.51,-439.24 Y1.1 215.19,-422.57 C3.1
XL2: C4.1 U1.41 Y1.2 | length 205.5
  Top Layer w8: C4.1 115.71,-423.49 Y1.2 131.46,-439.24 131.46,-490.23 143.87,-502.64 U1.41
pads on no net: CON1.6 CON4.2 CON5.2 CON6.2 CON7.2 CON8.2 CON9.6 U1.2 U1.4 U1.5 U1.6 U1.7 U1.8 U1.9 U1.10 U1.11 U1.12 U1.13 U1.14 U1.15 U1.16 U1.17 U1.18 U1.21 U1.24 U1.25 U1.32 U1.34 U1.36 U1.38 U1.44 U1.45 U1.46 U1.48 U1.50 U1.56 U1.57 U1.59 U1.60 U1.61 U1.62 U1.63 U1.64 U2.11 U3.0 U4.A2 U5.2 U5.5 U6.7 U6.10 U6.18 U6.25

## Polygon pours and split planes (outlines as drawn)
GND on Top Layer "NONET_L01_P000" (solid, shelved, pour order 0): -805.12,-1446.85 -553.91,-1557.09 -261.81,-1633.86 15.75,-1653.54 295.28,-1629.92 554.67,-1557.09 789.37,-1454.72 1039.37,-1289.37 1169.29,-1169.29 -940.94,-1165.35 -1092.32,-1236.22 -915.35,-1377.95 -803.15,-1446.85

## Keep-outs
Keep-Out Layer:
  the board outline again, w10

## Silkscreen, mask and mechanical layers (free items; w line width, h text height)
Bottom Overlay:
  circle w10: c0,-1181.1 r102.36
  circle w10: c0,1102.36 r102.36
  circle w10: c-1181.1,0 r102.36
Dimensions:
  circle w10: c0,0 r1299.21
  circle w10: c0,0 r1535.43
  lines w10: -2588.58,0 0,0 ; -1948.82,-1192.91 1948.82,-1192.91 ; -1948.82,-984.25 2118.11,-984.25 ; -1925.2,984.25 2039.37,984.25 ; -1633.26,-937.61 0,0 ; -1615.89,939.96 0,0 ; -1075.8,1872.69 0,0 ; -1000.11,-1725.69 0,0 ; -690.36,-1979.73 -690.36,1815.55 ; -523.62,-2033.46 -523.62,1929.13 ; -523.62,-984.25 -1091.88,0 -523.62,984.25 ; 0,-2586.61 0,-3.94 ; 0,2039.37 0,0 ; 523.62,-2124.02 523.62,1895.67 ; 523.62,-984.25 1092.13,0 ; 523.62,984.25 1091.88,0 ; 689.72,-1937.01 689.72,1880.67 ; 795.28,-1826.77 795.28,2110.24 ; 981.24,1706.51 0,0 ; 991.87,-1700.35 0,0 ; 1676.25,-972.22 0,0 ; 1861.89,1105.5 0,0 ; 2507.87,0 0,0
Technical:
  lines w10: -937.01,269.69 -936.18,269.69

## Text inside footprints (layer, text, board x,y; h text height)
U3: Top Overlay "+" at 971.69,-167.31 h19.68 r240; Top Overlay "-" at 897.13,-295.65 h19.68 r240